# Altium PCB 220ACTo5VDC6AUSB_E3.PcbDoc
Units mil, origin at the board's own origin, x right, y up, seen from the top; angles counter-clockwise.
Board outline 2883 x 3461 mil, 2 copper layers (Top Layer, Bottom Layer); 44 components, 24 nets, 170 pads, 0 vias.
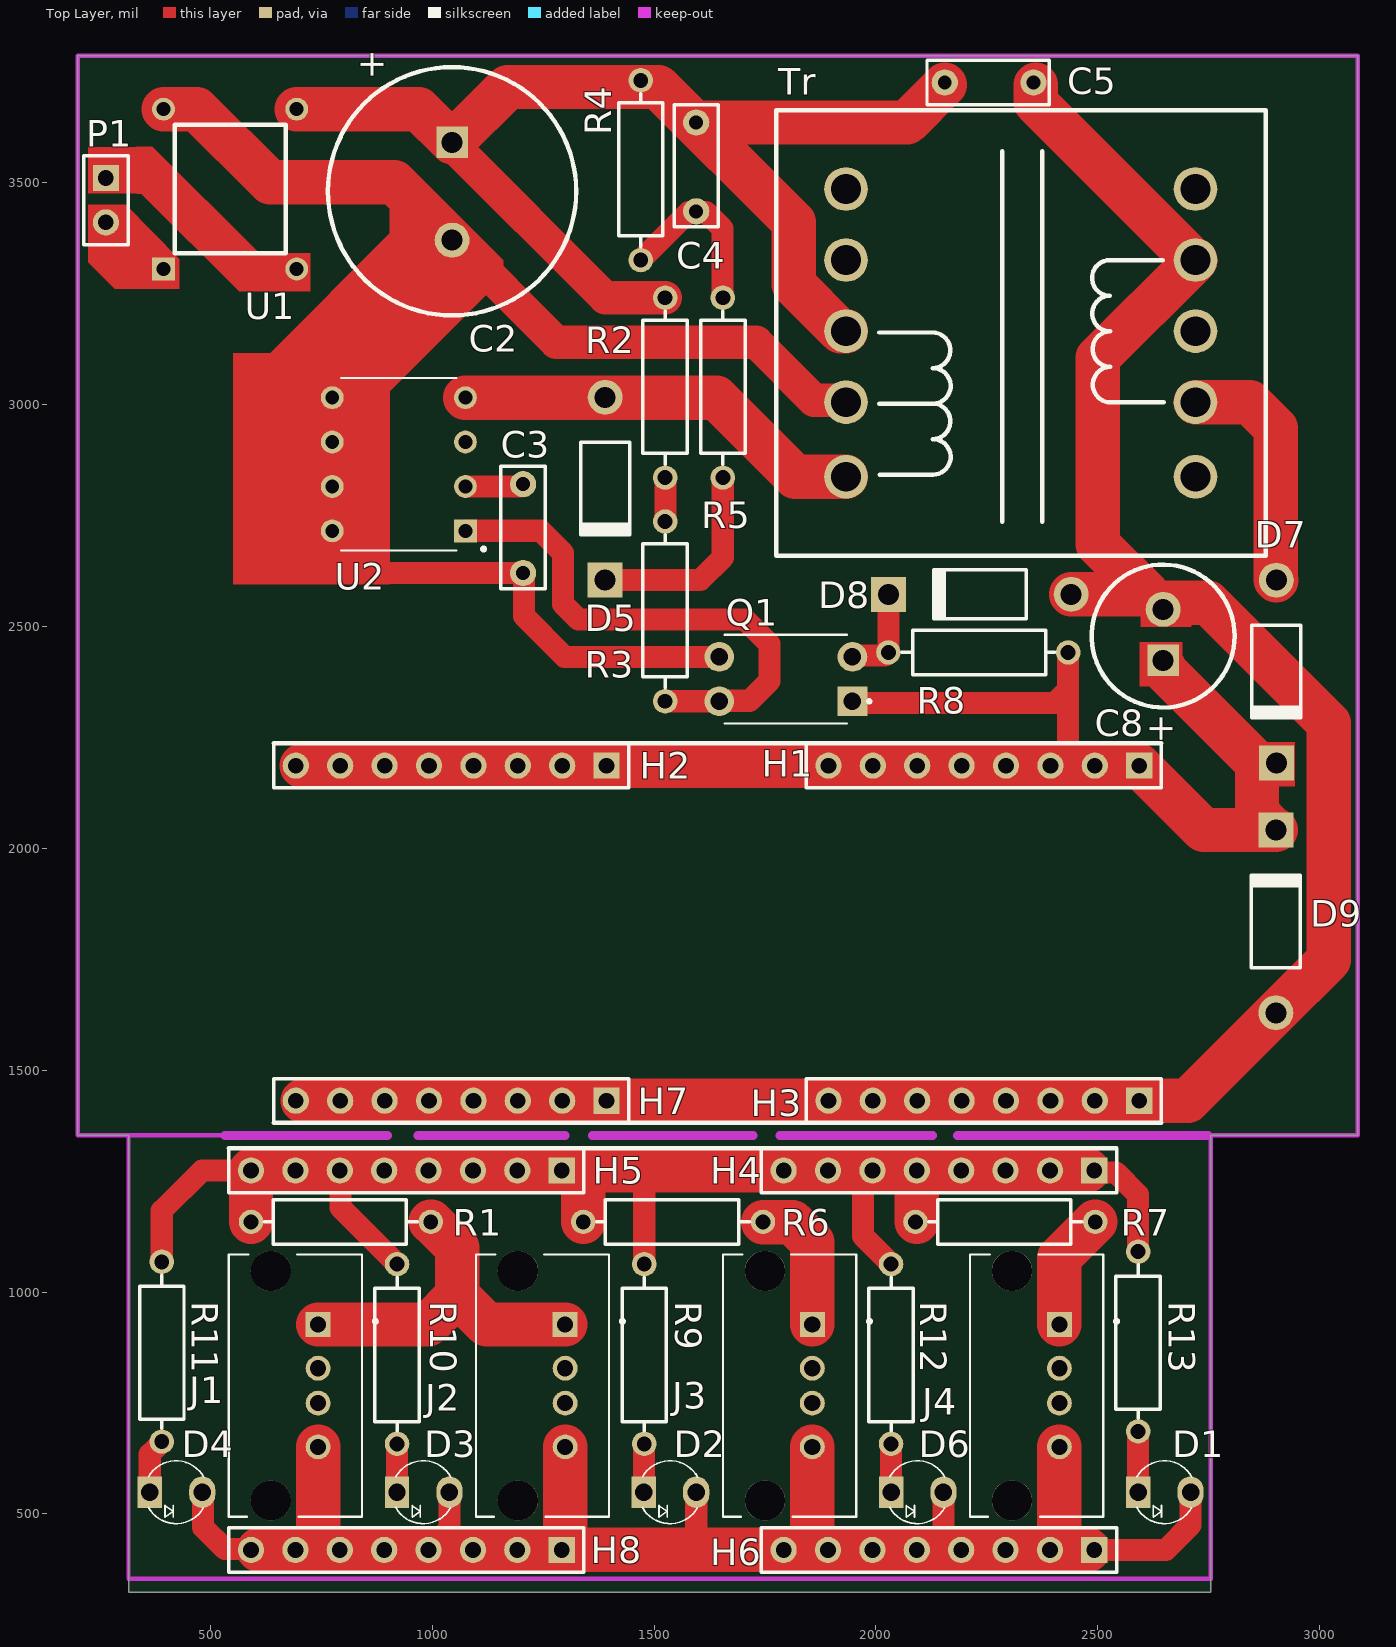
[diagram p0: Top Layer view]
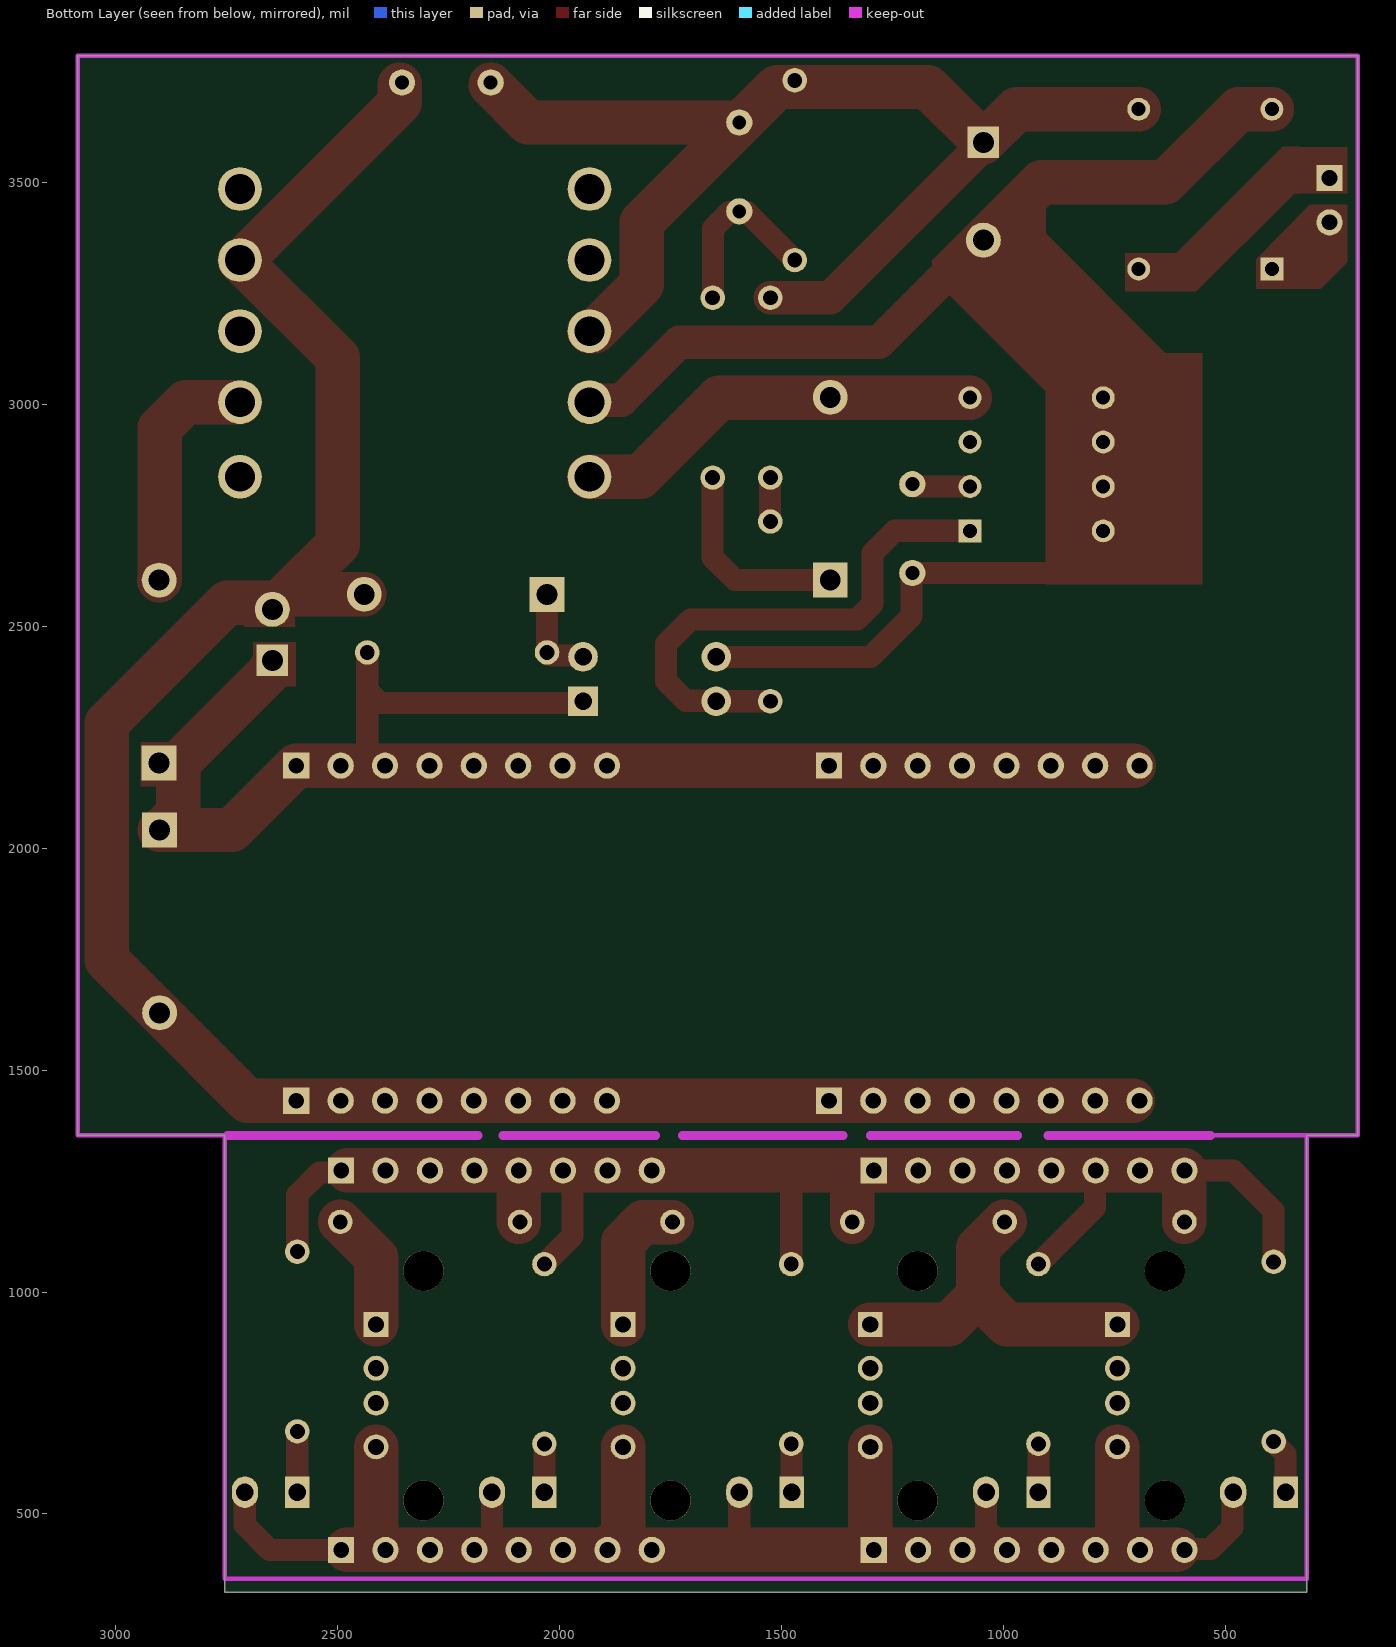
[diagram p1: Bottom Layer view, seen from below]
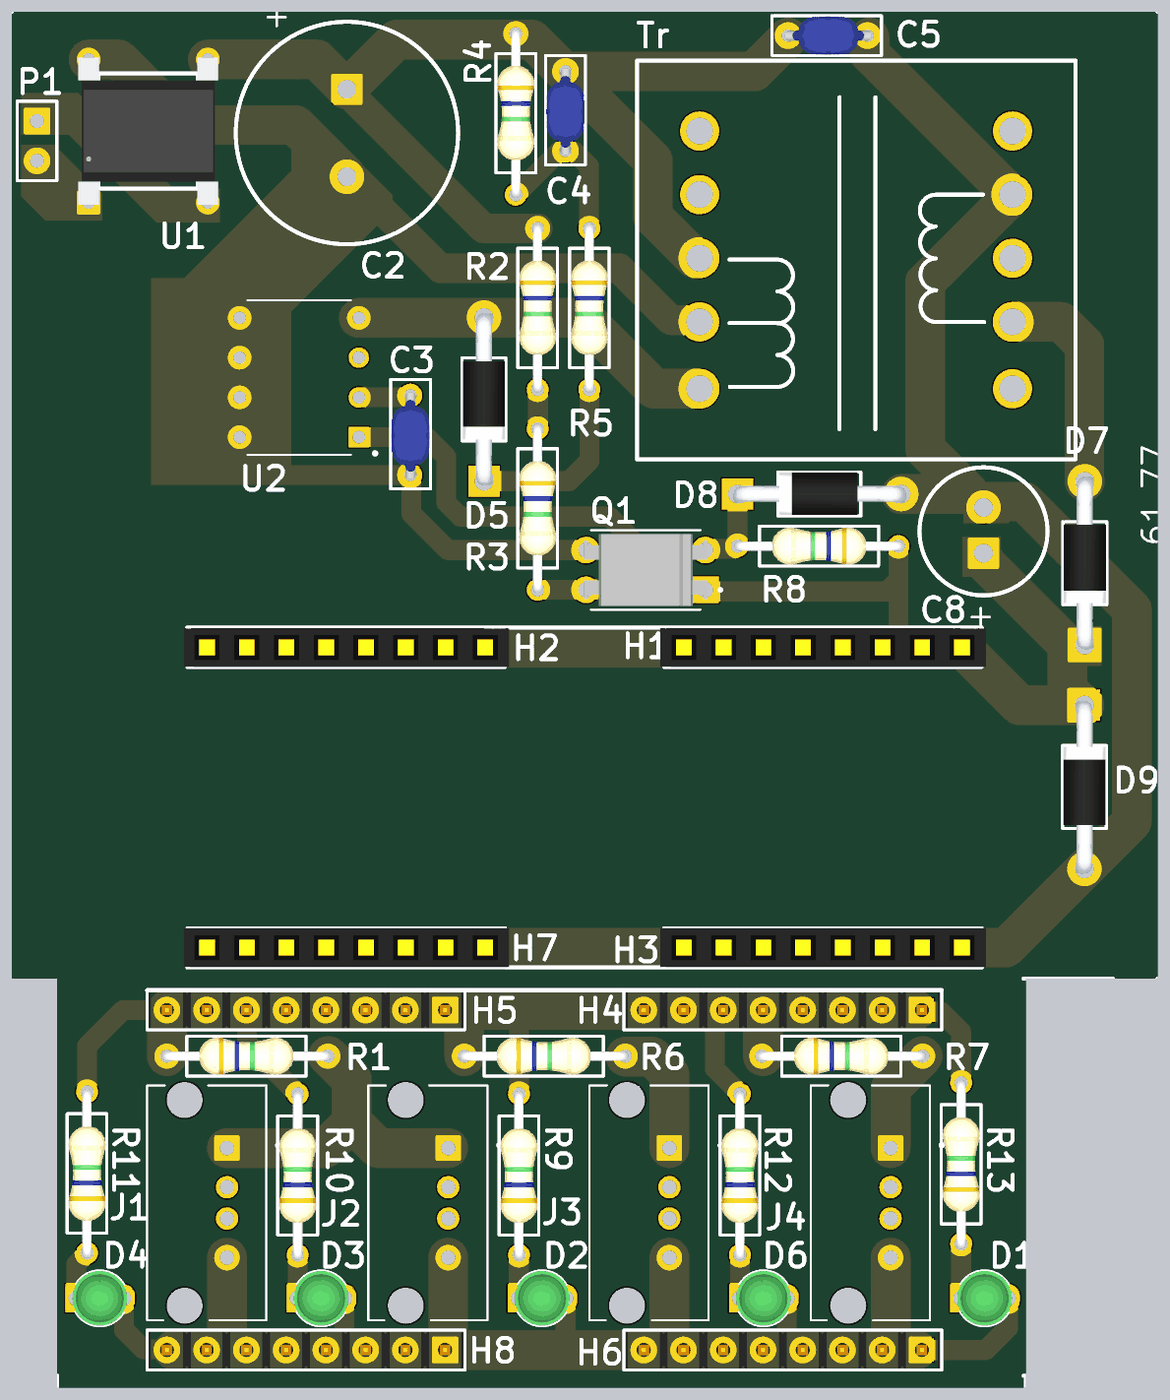
[diagram p2: 3D render of the assembled board from above, using the file's embedded part models]

## Layer stack, top to bottom
Top Solder: solder mask 0.4, Solder Resist, Dk 3.5
Top Layer: signal copper 1.4
Dielectric 1: dielectric 12.6, FR-4, Dk 4.8
Bottom Layer: signal copper 1.4
Bottom Solder: solder mask 0.4, Solder Resist, Dk 3.5

## Board outline
202,1353 202,3320 202,3785 3085,3785 3085,1353 2754,1353 2754,324 316,324 316,1353

## Design rules (kind name [scope] priority, off if disabled: settings)
Clearance [All] p1: gap=10 ignorepadtopadclearanceinfootprint=FALSE except(0: Arc-Hole Track-Hole SMDPad-Hole THPad-Hole Via-Hole Fill-Hole Poly-Hole Region-Hole Text-Hole)
Height [All] p1: minheight=0 maxheight=1968.5 prefheight=500
PlaneConnect [All] p1: planeconnectstyle=Direct reliefexpansion=20 reliefentries=4 reliefconductorwidth=10 reliefairgap=10
PolygonConnect [All] p1: connectstyle=Direct reliefconductorwidth=10 reliefentries=4 polygonreliefangle="90 Angle" airgapwidth=10
RoutingVias [All] p1: holewidth=28 width=50 viastyle="Through Hole" minholewidth=28 minwidth=50 maxholewidth=28 maxwidth=50
SolderMaskExpansion [All] p1: expansion=4 istentingtop=FALSE
Width [All] p1: maxlimit=100 minlimit=10 preferedwidth=20
28 further rules are at their usual default settings.

## Components (designator, comment, footprint, x,y, rotation, side; value= is the part's Value field where it differs from the comment)
C2 "400V" "RB7.6_15_400v33uf - duplicate" 1045,3480 r90 top value=33uF
C3 "Cap" RAD-0.3_Ceramic_CAP 1210,2720 r90 top
C4 "1kV" RAD-0.3_Ceramic_CAP 1600,3535 r90 top
C5 "250VAC" RAD-0.3_Ceramic_CAP 2255,3730 r180 top
C8 "10V" RB7.6_15_400V33UF 2647,2478 r270 top value=3300uF
D1 "LED3MM" LED3mm_GREEN 2630.67,549 r0 top
D2 "LED3MM" LED3mm_GREEN 1516.89,549 r0 top
D3 "LED3MM" LED3mm_GREEN 960.89,549 r0 top
D4 "LED3MM" LED3mm_GREEN 404,549 r0 top
D5 "Diode 1N4937" DO-41_1N4006 1390,2810 r270 top
D6 "LED3MM" LED3mm_GREEN 2074,549 r0 top
D7 "Diode ?????" DO-41_1N4006 2902,2398 r270 top
D8 "D Zener" DO-41_1N4006 2234,2572 r180 top
D9 "D Zener" DO-41_1N4006 2901,1835 r90 top
H1 "Female" "Header1X8 - female" 2593,2186 r180 top
H2 "Female" "Header1X8 - female" 1393,2186 r180 top
H3 "Female" "Header1X8 - female" 2593,1431 r180 top
H4 "Male" "HEADER1X8 - MALE" 2492,1274 r180 top
H5 "Male" "HEADER1X8 - MALE" 1292,1274 r180 top
H6 "Male" "HEADER1X8 - MALE" 2492,419 r180 top
H7 "Female" "Header1X8 - female" 1393,1431 r180 top
H8 "Male" "HEADER1X8 - MALE" 1292,419 r180 top
J1 "1734366-3" USB_Vertical 692,789 r270 top
J2 "1734366-3" USB_Vertical 1248.67,789 r270 top
J3 "1734366-3" USB_Vertical 1805.33,789 r270 top
J4 "1734366-3" USB_Vertical 2362,789 r270 top
P1 "220 VAC IN" HDR1X2 265,3510 r270 top
Q1 "PC817A" "PC817 Dip" 1797,2381 r180 top
R1 "2W" AXIAL-0.5_Res 792,1158 r180 top
R2 "Res Semi" AXIAL-0.5_Res 1525,3040 r90 top value=4.53M
R3 "Res Semi" AXIAL-0.5_Res 1525,2536 r90 top value=4.53M
R4 "2W" AXIAL-0.5_Res 1470,3530 r90 top
R5 "Res Semi" AXIAL-0.5_Res 1655,3040 r90 top value=8.2R
R6 "2W" AXIAL-0.5_Res 1540.5,1158 r180 top
R7 "2W" AXIAL-0.5_Res 2289,1158 r180 top
R8 "Res Semi" AXIAL-0.5_Res 2233,2441 r0 top value=100R
R9 "Res Semi" AXIAL-0.5_Res 1478,858 r270 top value=100R
R10 "Res Semi" AXIAL-0.5_Res 921,858 r270 top value=100R
R11 "Res Semi" AXIAL-0.5_Res 391,863 r270 top value=100R
R12 "Res Semi" AXIAL-0.5_Res 2034,858 r270 top value=100R
R13 "Res Semi" AXIAL-0.5_Res 2590.67,886 r270 top value=100R
Tr "Trans E25" Trans 1932.6,2836.8 r0 top
U1 "DF08M-E3/45" DF08M 720,3300 r90 top
U2 "TNY280PN" DIP762W46P254L988H533Q8 925,2865 r180 top

## Footprints (in the part's own frame and the unit in brackets; to place one, negate y for a bottom-side part, rotate by r counter-clockwise, add the part's x,y. Pads: shape width x height; smd on the part's side, far side on the other; paste and mask are expansions set on the pad)
AXIAL-0.5_Res [mm] "Axial Device, Thru-Hole; 2 Leads; 0.5 in Pin Spacing"
  round 1.4 hole 0.85: 1(-5.207,0) 2(5.08,0)
  silkscreen extent -4.44,-1.27 4.32,1.27, body extent -5.4,-1.2 5.4,1.2, height 2.4
DF08M [mil]
  rect 51.5x51.5 hole 31.5: 1(5,325)
  round 51.5 hole 31.5: 2(5,25) 3(365,25) 4(365,325)
  silkscreen extent 40,50 330,300, body extent 0,-1 370,351, height 215
DIP762W46P254L988H533Q8 [mm]
  rect 1.308x1.308 hole 0.8: 1(-3.81,3.81)
  round 1.308 hole 0.8: 2(-3.81,1.27) 3(-3.81,-1.27) 4(-3.81,-3.81) 5(3.81,-3.81) 6(3.81,-1.27) 7(3.81,1.27) 8(3.81,3.81)
  silkscreen extent -4.95,-4.94 3.3,4.95, body extent -3.94,-4.97 3.94,4.83, height 4.7
DO-41_1N4006 [mm] "Diode, Axial; Body 5.2 x 2.7 mm (LxDia. max), Lead Dia. 0.86 mm (max)"
  round 2 hole 1.2: 1(-5.23,0)
  rect 2x2 hole 1.2: 2(5.23,0)
  silkscreen extent -2.65,-1.4 2.75,1.4, body extent -5.53,-1.36 5.49,1.34, height 2.78
HDR1X2 [mm] "Connector; Header; 2 Position"
  rect 1.5x1.5 hole 0.9: 1(0,0)
  round 1.5 hole 0.9: 2(2.54,0)
  silkscreen extent -1.27,-1.27 3.81,1.27
"Header1X8 - female" [mm] "Connector; Header; 6 Position"
  rect 1.5x1.5 hole 0.9: 1(0,0)
  round 1.5 hole 0.9: 2(2.54,0) 3(5.08,0) 4(7.62,0) 5(10.16,0) 6(12.7,0) 7(15.24,0) 8(17.78,0)
  silkscreen extent -1.27,-1.27 19.05,1.27, body extent -1.52,-1.25 19.3,1.25, height 5
"HEADER1X8 - MALE" [mm] "Connector; Header; 6 Position"
  rect 1.5x1.5 hole 0.9: 1(0,0)
  round 1.5 hole 0.9: 2(2.54,0) 3(5.08,0) 4(7.62,0) 5(10.16,0) 6(12.7,0) 7(15.24,0) 8(17.78,0)
  silkscreen extent -1.27,-1.27 19.05,1.27, body extent -1.27,-1.27 19.05,1.27, height 3.05
LED3mm_GREEN [mm]
  rect 1.397x1.8 hole 1: 1(-1.016,0)
  oval 1.5x1.8 hole 1: 2(1.984,0)
  silkscreen extent -1.1,-1.8 2.06,1.8, body extent -1.27,-1.75 2.23,1.75, height 3.9
"PC817 Dip" [mm]
  rect 1.7x1.7 hole 1: 1(-3.81,1.27)
  round 1.7 hole 1: 2(-3.81,-1.27) 3(3.81,-1.27) 4(3.81,1.27)
  silkscreen extent -4.86,-2.54 3.5,2.54, body extent -3.94,-2.29 3.94,2.29, height 4.26
RAD-0.3_Ceramic_CAP [mm] "Radial Cap, Thru-Hole; 2 Leads; 0.3 in Pin Spacing"
  round 1.5 hole 0.8: 1(-2.54,0.127) 2(2.54,0.127)
  silkscreen extent -3.43,-1.14 3.56,1.4, body extent -2.86,-1.1 2.79,1.35, height 5.2
RB7.6_15_400V33UF [mm] "Polarized Capacitor (Radial); 2 Leads"
  rect 1.8x1.8 hole 1.2: 1(1.397,0)
  round 2 hole 1.2: 2(-1.524,0)
  silkscreen extent -4.09,-4.09 4.09,4.09, body extent -8.76,-3.98 3.99,4.01, height 10.01
"RB7.6_15_400v33uf - duplicate" [mm] "Polarized Capacitor (Radial); 2 Leads"
  rect 1.8x1.8 hole 1.2: 1(2.794,0)
  round 2 hole 1.2: 2(-2.794,0)
  silkscreen extent -7.11,-7.11 7.11,7.11, body extent -7.05,-6.98 6.99,7.02, height 15.01
Trans [mm]
  round 2.5 hole 1.7: 1(0,16.464) 2(0,12.4) 3(0,8.336) 4(0,4.272) 5(0,0) 6(20,0) 7(20,4.272) 8(20,8.336) 9(20,12.4) 10(20,16.464)
  silkscreen extent -4.01,-4.51 24.03,20.96, body extent -3.97,-4.48 24.1,20.96, height 19.9
USB_Vertical [mm]
  rect 1.428x1.428 hole 0.92: 1(-3.5,1.3)
  round 1.428 hole 0.92: 2(-1,1.3) 3(1,1.3) 4(3.5,1.3)
  round 2.3 hole 2.3 unplated: ""(-6.57,-1.41) ""(6.57,-1.41)
  silkscreen extent -7.5,-3.81 7.5,4.67, body extent -6.4,-2.87 6.1,3.13, height 15

## Part data
C2 C8: library part "Cap Pol1", "Polarized Capacitor (Radial)", LatestRevisionDate=17-Jul-2002, LatestRevisionNote="Re-released for DXP Platform.", PackageDescription="Polarized Capacitor (Radial); 2 Leads", PackageReference=RB7.6-15, Published=8-Jun-2000, Publisher="Altium Limited"
C3: "Capacitor", 16V=10uF, LatestRevisionDate=17-Jul-2002, LatestRevisionNote="Re-released for DXP Platform.", PackageDescription="Radial Cap, Thru-Hole; 2 Leads; 0.3 in Pin Spacing", PackageReference=RAD-0.3, Published=8-Jun-2000, Publisher="Altium Limited"
C4 C5: library part Cap, "Capacitor", LatestRevisionDate=17-Jul-2002, LatestRevisionNote="Re-released for DXP Platform.", PackageDescription="Radial Cap, Thru-Hole; 2 Leads; 0.3 in Pin Spacing", PackageReference=RAD-0.3, Published=8-Jun-2000, Publisher="Altium Limited"
  C4: 1kV=1.2nF
  C5: 250v=2.2nF
D1 D2 D3 D4 D6: library part "LED 3MM", "Light Emitting Diode", Designer="Ali Hafizi"
D5: library part "Diode 1N4001", "1 Amp General Purpose Rectifier", Code_JEDEC=DO-204-AL, ComponentLink1Description="Manufacturer Link", ComponentLink1URL=http://www.fairchildsemi.com/, ComponentLink2Description=Datasheet, ComponentLink2URL=http://www.fairchildsemi.com/ds/1N%2F1N4001.pdf, DatasheetVersion=1998, LatestRevisionDate=17-Jul-2002, LatestRevisionNote="Re-released for DXP Platform.", PackageDescription="Diode, Axial; Body 5.2 x 2.7 mm (LxDia. max), Lead Dia. 0.86 mm (max)", PackageReference=DO-41, PackageVersion=Aug-1999, Published=8-Jun-2000, Publisher="Altium Limited"
D7: library part "Diode 11DQ03", "Schottky Rectifier", Code_JEDEC=DO-204-AL, ComponentLink1Description="Manufacturer Link", ComponentLink1URL=http://www.irf.com/, ComponentLink2Description=Datasheet, ComponentLink2URL=http://www.irf.com/product-info/datasheets/data/11dq03.pdf, DatasheetVersion=Dec-1997, LatestRevisionDate=17-Jul-2002, LatestRevisionNote="Re-released for DXP Platform.", PackageDescription="Diode, Axial; Body 5.2 x 2.7 mm (LxDia. max), Lead Dia. 0.86 mm (max)", PackageReference=DO-204AL, Published=8-Jun-2000, Publisher="Altium Limited"
D8 D9: "Zener Diode", LatestRevisionDate=17-Jul-2002, LatestRevisionNote="Re-released for DXP Platform.", PackageDescription="Diode, Thru-Hole; 2 Leads; 0.7 in Pin Spacing", PackageReference=DIODE-0.7, Published=8-Jun-2000, Publisher="Altium Limited"
H1 H2 H3 H4 H5 H6 H7 H8: library part Header-8Pin
J1 J2 J3 J4: "Conn USB 2.0 Type A RCP 4 POS Solder ST Thru-Hole 4 Terminal 1 Port Box/Tray", Package=None, Availability=Unavailable, MF="TE Connectivity", MP=1734366-3, Price=None, SnapEDA_Link=https://www.snapeda.com/parts/1734366-3/TE%20Connectivity%20AMP%20Connectors/view-part/2506297/?ref=snap
P1: library part "Header 2", "Header, 2-Pin", LatestRevisionDate=17-Jul-2002, LatestRevisionNote="Re-released for DXP Platform.", Publisher="Altium Limited"
Q1: "Optoisolator Transistor Output 5000Vrms 1 Channel 4-DIP", Package="DIP-4 Taiwan Semiconductor", Availability=Unavailable, MF="Taiwan Semiconductor", MP=PC817A, Price=None, SnapEDA_Link=https://www.snapeda.com/parts/PC817A/Taiwan%20Semiconductor%20Corporation/view-part/2178336/?ref=snap
R1 R4 R6 R7: library part "Res Semi", "Semiconductor Resistor", 2W=75K, LatestRevisionDate=17-Jul-2002, LatestRevisionNote="Re-released for DXP Platform.", PackageDescription="Axial Device, Thru-Hole; 2 Leads; 0.5 in Pin Spacing", PackageReference=AXIAL-0.5, Published=8-Jun-2000, Publisher="Altium Limited"
R2 R3 R5 R8 R9 R10 R11 R12 R13: "Semiconductor Resistor", LatestRevisionDate=17-Jul-2002, LatestRevisionNote="Re-released for DXP Platform.", PackageDescription="Axial Device, Thru-Hole; 2 Leads; 0.5 in Pin Spacing", PackageReference=AXIAL-0.5, Published=8-Jun-2000, Publisher="Altium Limited"
U2: "Dip"
U1: Built_By=EMA_UL_Team, Copyright="Copyright (C) 2018 Accelerated Designs. All rights reserved", Manufacturer_Part_Number=DF08M-E3/45, RefDes=RefDes, SourceLibrary=Vishay_2010-01-01_Comps, Type=DEV, Vendor=VISHAY

## Nets (pads, with @x,y where several pads share a name; then routed paths per layer and width w, separated by ;. In a path a pad name is that pad's centre, name@x,y a point inside that pad or via, vN(x,y) a via of type N, cw(c..) or ccw(c..) an arc to the next point about the centre after c; other vN are vias at no path point)
NetC2_1: C2.1 C4.2 C5.2 R2.2 R4.2 Tr.3 U1.3 | length 2851.9
  Top Layer w75: C2.1@1042.5,3587.5 1390,3240 R2.2
  Top Layer w100: U1.3 970,3665 C2.1 1170,3715 1510,3715 1815,3410 1815,3270 1920,3165 Tr.3 ; C4.2 2070,3635 C5.2@2155,3720
NetC3_2: C3.2 U2.2 | length 132.1
  Top Layer w50: U2.2 1197.55,2815 1202.55,2820 C3.2
NetC4_1: C4.1 R4.1 R5.2 | length 402.1
  Top Layer w50: R4.1 1578.27,3433.27 1593.27,3433.27 C4.1 1596.73,3433.27 1616.73,3433.27 1654.02,3395.98 1654.02,3240.98 R5.2
NetC5_1: C5.1 C8.2 D8.1 D9.1 H3.1 H3.2 H3.3 H3.4 H3.5 H3.6 H3.7 H3.8 H7.1 H7.2 H7.3 H7.4 H7.5 H7.6 H7.7 H7.8 Tr.9 | length 5061.6
  Top Layer w100: H7.8@708,1431 H7.7 H7.6 H7.5 H7.4 H7.3 H7.2 H7.1 H3.8 H3.7 H3.6 H3.5 H3.4 H3.3 H3.2 H3.1 2702.91,1431 D9.1 3020,1748.09 3020,2282 2749,2553 C8.2@2659,2553 ; C5.1@2360,3720 2360,3680 2715,3325 Tr.9 2500,3105 2500,2685 2613,2572 D8.1
NetC8_1: C8.1 D7.2 D9.2 H1.1 H1.2 H1.3 H1.4 H1.5 H1.6 H1.7 H1.8 H2.1 H2.2 H2.3 H2.4 H2.5 H2.6 H2.7 H2.8 Q1.1 R8.2 | length 3489.8
  Top Layer w50: Q1.1 1951,2327 2403.71,2327 2433,2356.29 ; H1.3 2393,2188.45 2433,2228.45 2433,2356.29 ; R8.2 2433,2356.29
  Top Layer w100: H2.8@706,2186 H2.7 H2.6 H2.5 H2.4 H2.3 H2.2 H2.1 H1.8 H1.7 H1.6 H1.5 H1.4 H1.3 H1.2 H1.1 2738.09,2040.91 D9.2 ; C8.1@2649.14,2405.82 2649.14,2400.86 2858.58,2191.42 2858.58,2079.56 D9.2@2894.2,2043.95
NetD1_1: D1.1 R13.2 | length 137
  Top Layer w50: D1.1 R13.2
NetD1_2: D1.2 D2.2 D3.2 D4.2 D6.2 H6.1 H6.2 H6.3 H6.4 H6.5 H6.6 H6.7 H6.8 H8.1 H8.2 H8.3 H8.4 H8.5 H8.6 H8.7 H8.8 J1.4 J2.4 J3.4 J4.4 | length 3785.8
  Top Layer w50: D4.2 483.84,547.27 483.84,470.16 533.27,420.73 590.27,420.73 H8.8 ; H8.4 1039,466 D3.2 ; 1572,419 1595,442 D2.2 ; D6.2 2152.11,458.89 H6.4 ; H6.1 2653,419 2709,475 2709,548.78 D1.2
  Top Layer w100: H8.8@609,419 737,419 ; J1.4 743.18,425.18 737,419 ; J2.4 1299.85,426.85 H8.1 ; J3.4 1856.51,454.49 H6.7 ; J4.4 2413.18,440.18 H6.2 ; H6.1@2478,419 H6.2 ; 737,419 H8.5 H8.4 H8.1 ; H8.1 1572,419 H6.8 H6.7 ; H6.7 H6.6 H6.5 H6.4 H6.3 H6.2
NetD2_1: D2.1 R9.2 | length 109.5
  Top Layer w50: D2.1 1477.44,549.56 1477.44,657.44 R9.2
NetD3_1: D3.1 R10.2 | length 109
  Top Layer w50: D3.1 920.94,549.06 920.94,657.94 R10.2
NetD4_1: D4.1 R11.2 | length 125.2
  Top Layer w50: D4.1 364,634.61 391,661.61 R11.2
NetD5_1: D5.1 Tr.5 U2.4 | length 931.4
  Top Layer w100: U2.4 1345,3015 1390,3015 1640,3015 1818.2,2836.8 Tr.5
NetD5_2: D5.2 R5.1 | length 466.1
  Top Layer w50: D5.2 1604.09,2604.09 1655,2655 R5.1
NetD6_1: D6.1 R12.2 | length 109
  Top Layer w50: D6.1 R12.2
NetD7_1: D7.1 Tr.7 | length 548.2
  Top Layer w100: Tr.7 2842.42,3005 2901,2946.42 2901,2604.91 D7.1
NetD8_2: D8.2 Q1.2 R8.1 | length 225.2
  Top Layer w50: Q1.2@1950.24,2427.76 Q1.2 1950.24,2434.24 2019.85,2434.24 2026.61,2441 R8.1 R8.1 2028.05,2571.95 D8.2 D8.2@2024.98,2575.12
NetH4_1: H4.1 H4.2 H4.3 H4.4 H4.5 H4.6 H4.7 H4.8 H5.1 H5.2 H5.3 H5.4 H5.5 H5.6 H5.7 H5.8 R1.2 R6.2 R7.2 R9.1 R10.1 R11.1 R12.1 R13.1 | length 3549
  Top Layer w50: R11.1 391,1183 482,1274 H5.8 ; H5.6 793.73,1272.27 793.73,1190.27 R10.1 ; R9.1 1478,1263 1489,1274 ; H4.6 1992,1271.55 1971,1250.55 1971,1126 R12.1 ; H4.1 2496.53,1269.47 2540.53,1269.47 2590.67,1219.33 R13.1
  Top Layer w100: R1.2 H5.8 ; H5.8@607,1274 H5.7 H5.6 H5.5 H5.4 H5.3 H5.2 H5.1 1345,1274 ; R6.2 1340.5,1269.5 1345,1274 ; R7.2@2092,1158 H4.5 ; H4.1@2477,1274 H4.2 H4.3 H4.4 H4.5 ; 1345,1274 1489,1274 H4.8 H4.7 H4.6 H4.5
NetJ1_1: J1.1 J2.1 R1.1 | length 802.2
  Top Layer w100: J1.1 990.8,926.8 1057,993 ; R1.1 998.42,1158 1057,1099.42 1057,993 ; J2.1 1123.2,926.8 1057,993
NetJ3_1: J3.1 R6.1 | length 315.6
  Top Layer w50: R6.1 R6.1@1746.48,1157.02
  Top Layer w100: R6.1@1746.48,1157.02 1811.98,1157.02 1856.51,1112.49 J3.1
NetJ4_1: J4.1 R7.1 | length 264.7
  Top Layer w100: J4.1 2413.18,1077.18 R7.1
NetP1_1: P1.1 U1.2
NetP1_2: P1.2 U1.1
NetQ1_4: Q1.4 R3.1 U2.1 | length 1195
  Top Layer w50: U2.1 1245,2715 1295,2665 1295,2550 1330,2515 1705,2515 1760,2460 1760,2377 1715,2332 1648,2332 Q1.4 R3.1
NetR2_1: R2.1 R3.2 | length 100.8
  Top Layer w50: R3.2@1524.02,2736.98 R3.2 ; R2.1 1525.98,2834.02 R3.2@1525.98,2736
S: C2.2 C3.1 Q1.3 Tr.4 U1.4 U2.5 U2.6 U2.7 U2.8 | length 2869.6
  Top Layer w50: U2.8 775.29,2714.71 775.29,2699.71 855,2620 C3.1 1206.73,2618.27 1206.73,2523.27 1299,2431 Q1.3 ; Q1.3@1646.76,2426.76 Q1.3@1650,2430
  Top Layer w75: C2.2 1045.72,3369.28 1050.72,3369.28 1280,3140 1730,3140 1860.52,3009.48 1928.12,3009.48 Tr.4
  Top Layer w100: U1.4 470,3665 635,3500 915,3500 C2.2
pads on no net: J1. J1.2 J1.3 J2. J2.2 J2.3 J3. J3.2 J3.3 J4. J4.2 J4.3 Tr.1 Tr.2 Tr.6 Tr.8 Tr.10 U2.3

## Polygon pours and split planes (outlines as drawn)
no net on Top Layer "NONET_L02_P-001" (solid, pour order 3): 2205,1805
no net on Top Layer "NONET_L02_P-001" (solid, pour order 0): 35,3555

## Keep-outs
Keep-Out Layer:
  lines w10: 533,1353 316,1353 ; 316,1353 202,1353 202,3320 202,3785 3085,3785 3085,1353 2754,1353 2754,354 316,354 316,1353
  lines w20: 533,1353 900,1353 ; 968,1353 1300,1353 ; 1361,1353 1723,1353 ; 1784,1353 2127,1353 ; 2184,1353 2748,1353

## Other copper
Top Layer:
  rectangle net NetC8_1: 2594,2364 2691,2465
  rectangle net NetC8_1: 2851,2139 2944,2239
  rectangle net NetC5_1: 2596,2498 2711,2595
  rectangle net NetP1_2: 225,3320 310,3450
  rectangle net NetP1_1: 225,3475 344.29,3580
  region net NetC5_1: 2428,1846
  region net S: 1160,3285 905,3030 905,2595 552,2595 552,3115 635,3115 905,3385 905,3440 1046.82,3438.18 1160,3325
  region net NetP1_1: 335,3475 345,3475 565,3255 725,3255 725,3340 610,3340 370,3580 335,3580
  region net NetP1_2: 310,3450 430,3326.89 430,3260 285,3260 225,3320

## Silkscreen, mask and mechanical layers (free items; w line width, h text height)
Top Overlay:
  lines w10: 542,1324 2542,1324 ; 643,1381 2643,1381 ; 643,2236 2643,2236

## Dimensions
2754,354 to 316,354 on Top Overlay
3085,3785 to 202,3785 on Top Overlay
2748,1353 to 2754,354 on Top Overlay
3085,3785 to 3085,1353 on Top Overlay

## Text inside footprints (layer, text, board x,y; h text height)
C2: Top Overlay "+" at 891,3731 h59.06 r90
C8: Top Overlay "+" at 2617,2303 h59.06 r270